# Altium PCB extpart.PcbDoc
Units mil, origin at the board's own origin, x right, y up, seen from the top; angles counter-clockwise.
Board outline 3730.03 x 3990.03 mil, 2 copper layers (Top Layer, Bottom Layer); 95 components, 138 nets, 349 pads, 189 vias.
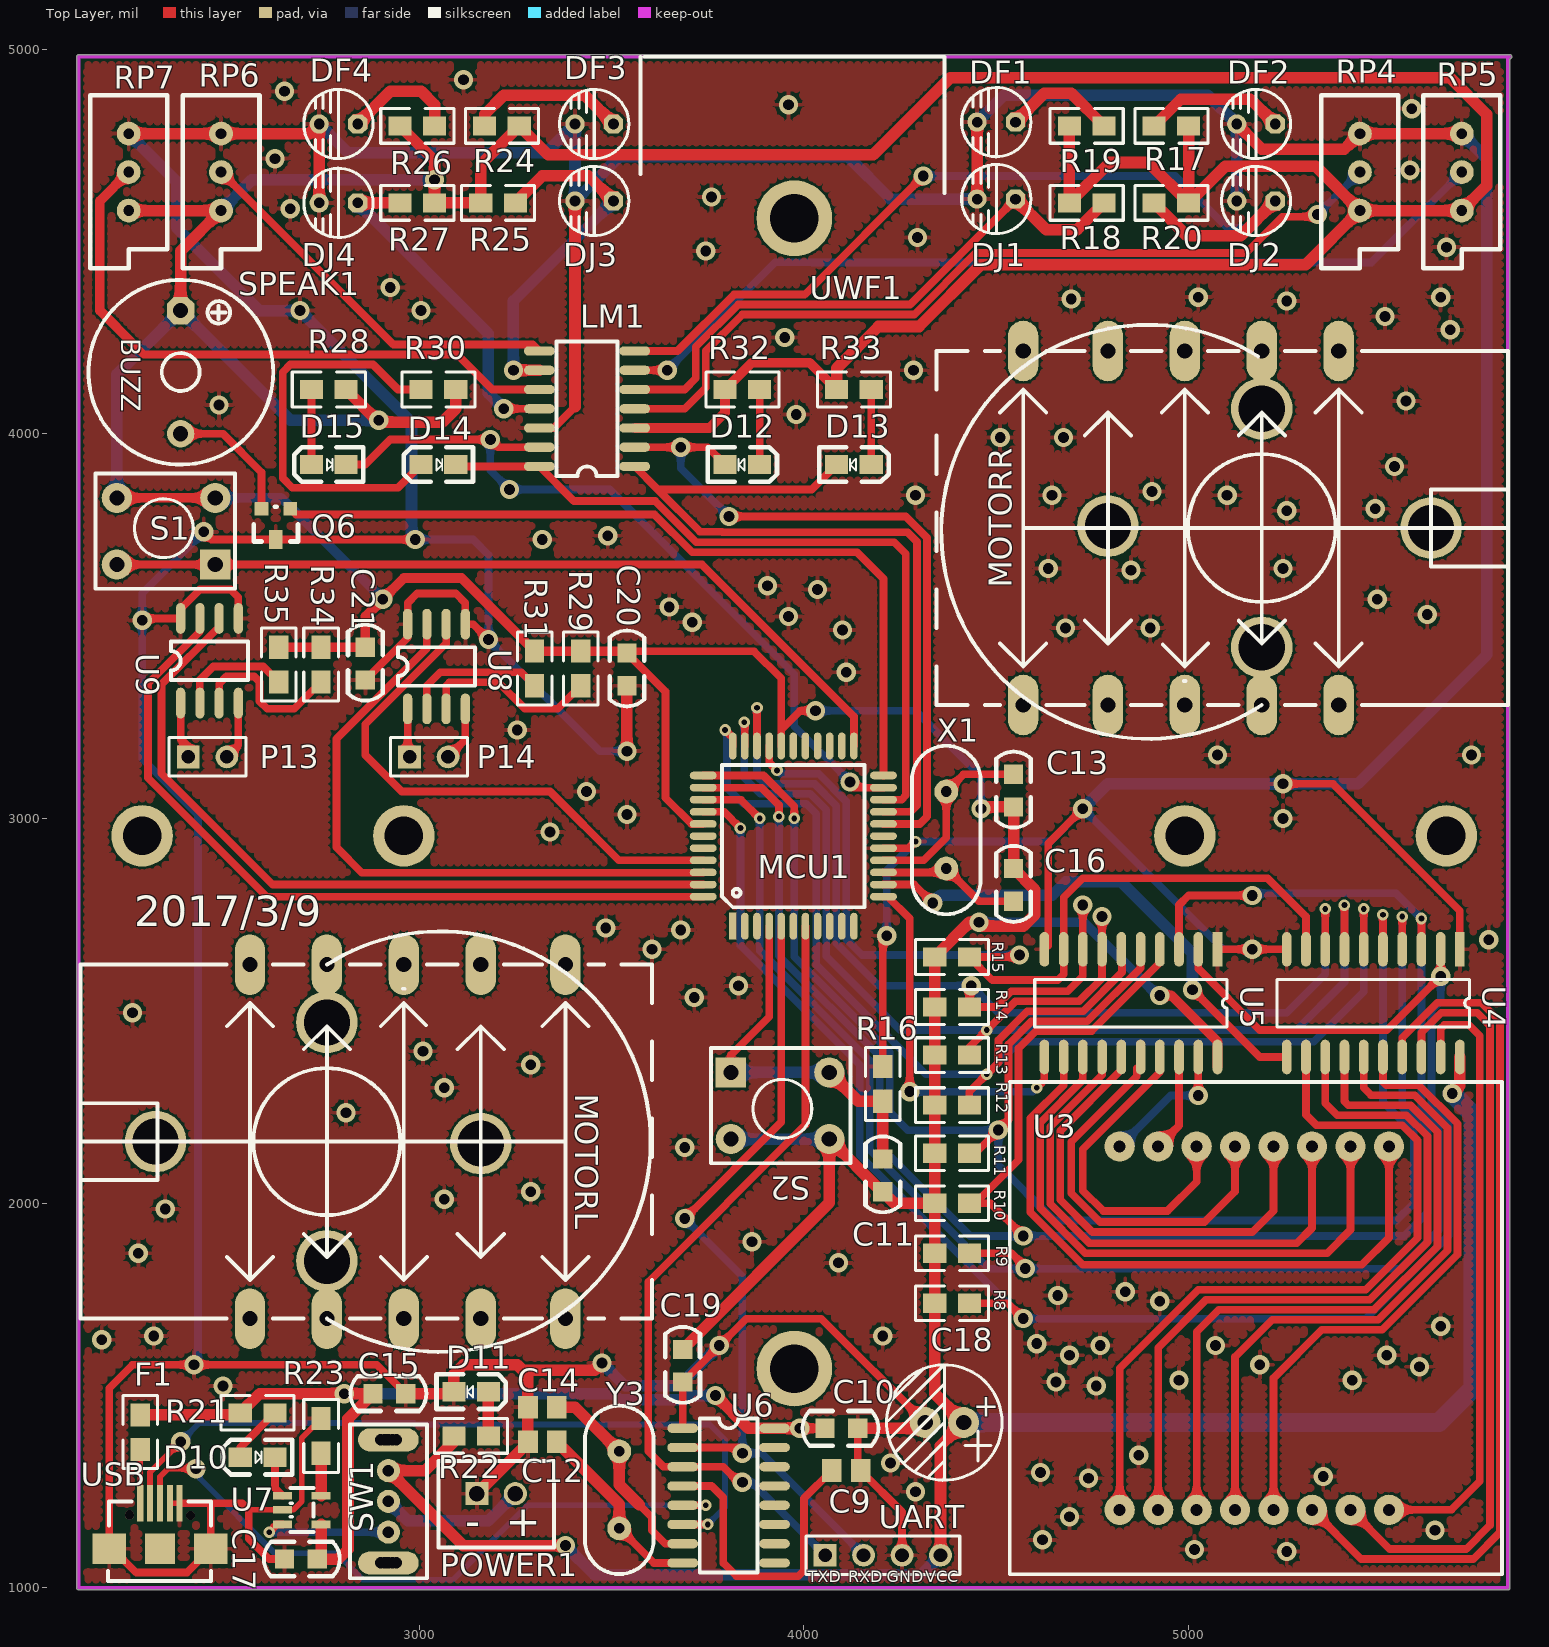
[diagram p0: Top Layer view]
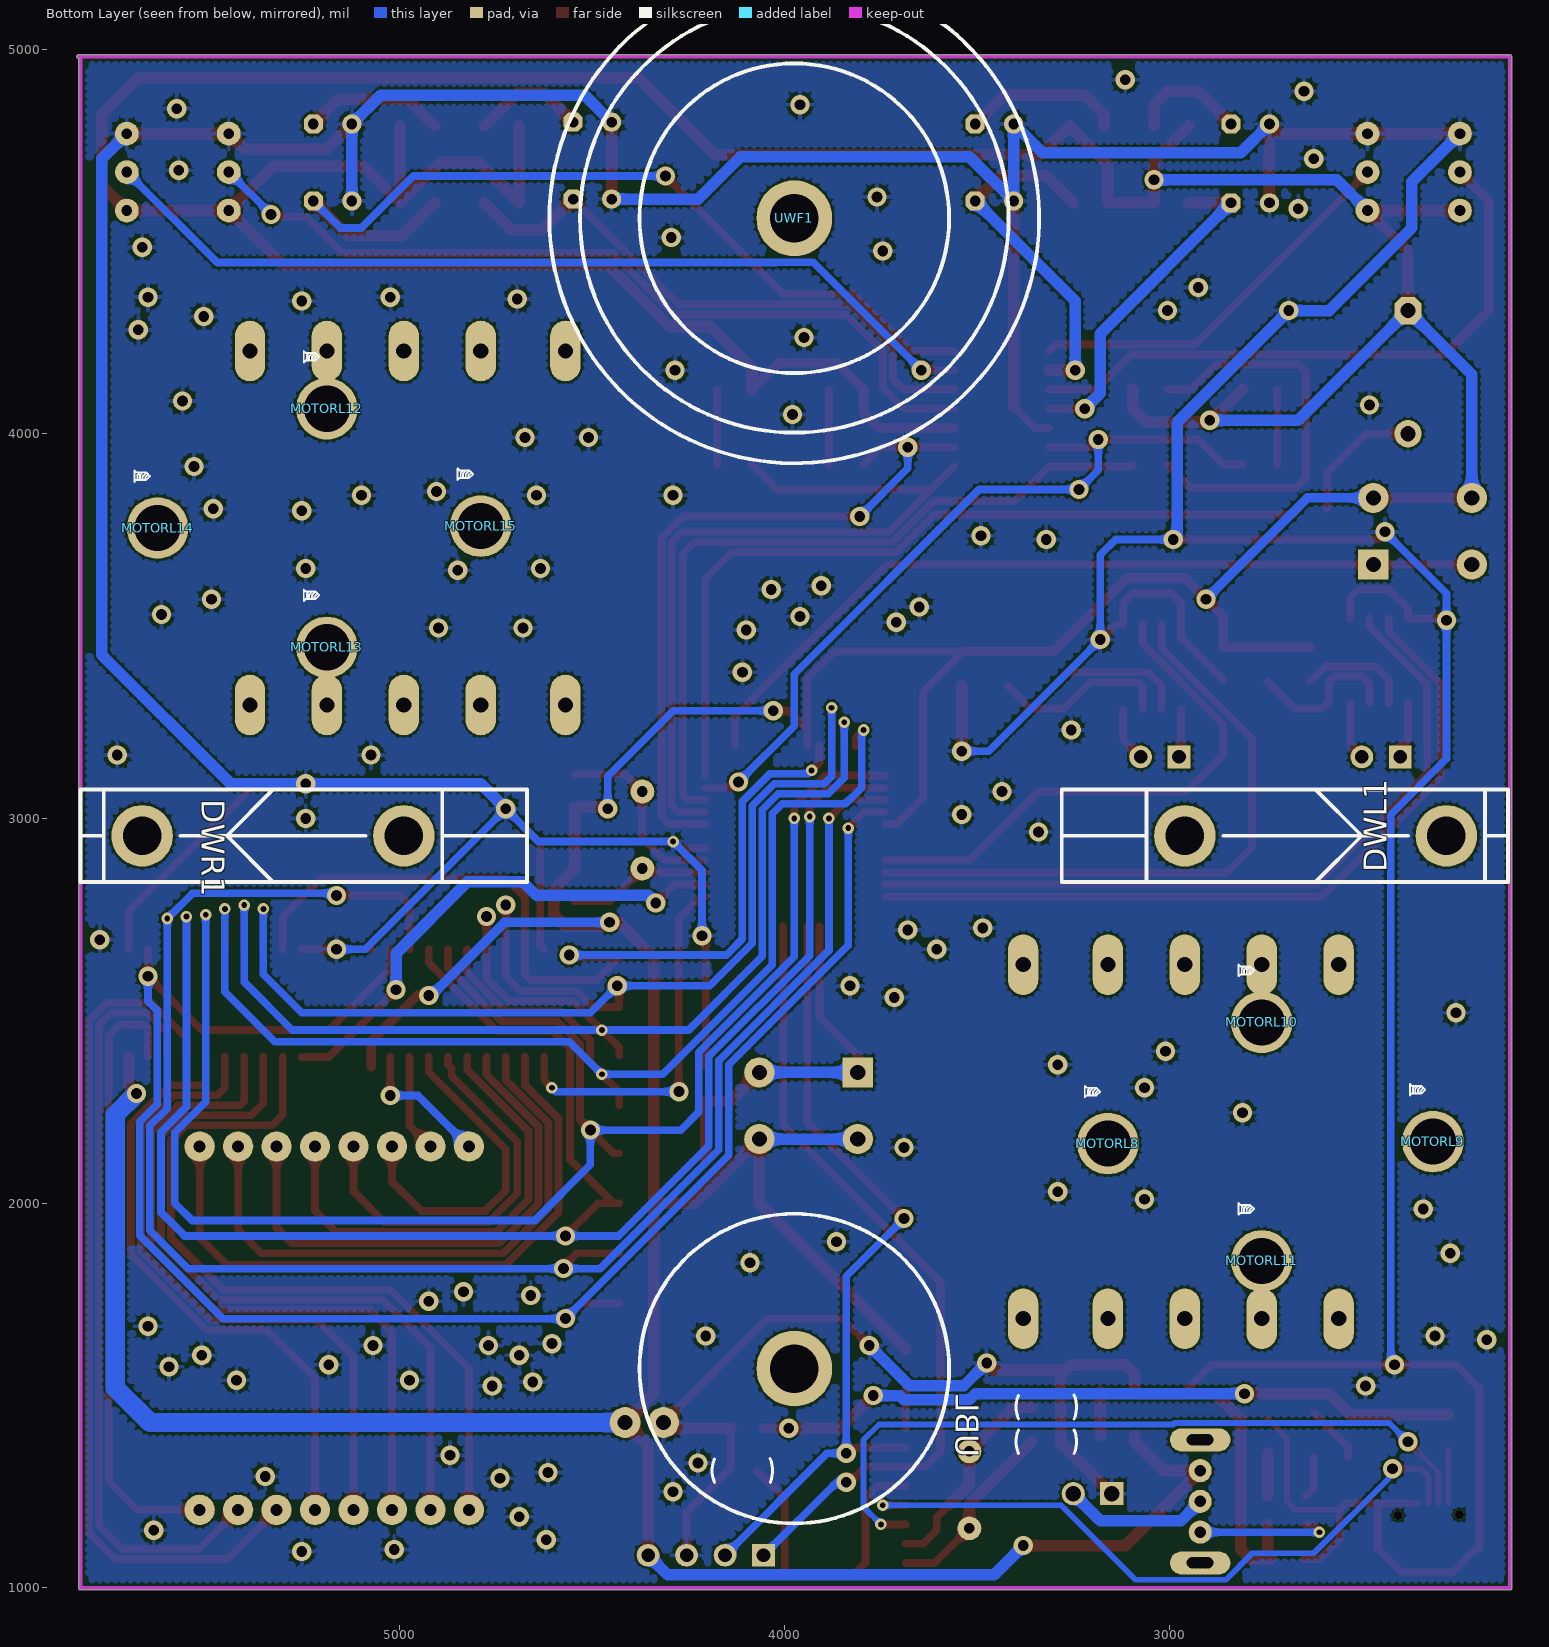
[diagram p1: Bottom Layer view, seen from below]

## Layer stack, top to bottom
Top Solder: solder mask 0.4, Solder Resist, Dk 3.5
Top Layer: signal copper 1.4
Dielectric 1: dielectric 12.6, FR-4, Dk 4.8
Bottom Layer: signal copper 1.4
Bottom Solder: solder mask 0.4, Solder Resist, Dk 3.5

## Board outline
2109.99,1000 ccw(c2115,1000) 2115,994.99 5830,994.99 ccw(c5830,1000) 5835.02,1000 5835.02,4974.98 ccw(c5835,4980) 5840.02,4980 ccw(c5835,4980) 5835,4985.02 2115,4985.02 ccw(c2115,4980) 2109.99,4980

## Design rules (kind name [scope] priority, off if disabled: settings)
Clearance [All] p1: gap=6
PolygonConnect [All] p1: connectstyle=Relief reliefconductorwidth=10 reliefentries=4 polygonreliefangle="90 Angle" airgapwidth=10
RoutingVias [All] p1: holewidth=28 width=50 viastyle="Through Hole" minholewidth=28 minwidth=50 maxholewidth=28 maxwidth=50
SolderMaskExpansion [All] p1: expansion=4
Width [All] p1: maxlimit=50 minlimit=10 preferedwidth=50
30 further rules are at their usual default settings.

## Classes and differential pairs
component class extpart: C9 C10 C11 C12 C13 C14 C15 C16 C17 C18 C19 C20 C21 D10 D11 D12 D13 D14 D15 DF1 DF2 DF3 DF4 DJ1 DJ2 DJ3 DJ4 DWL1 DWR1 F1 LM1 MCU1 P13 P14 POWER1 Q6 R8 R9 R10 R11 R12 R13 R14 R15 R16 R17 R18 R19 R20 R21 R22 R23 R24 R25 R26 R27 R28 R29 R30 R31 R32 R33 R34 R35 RP4 RP5 RP6 RP7 S1 S2 SPEAK1 SW1 U3 U4 U5 U6 U7 U8 U9 UART USB UWF1 X1 Y3

## Components (designator, comment, footprint, x,y, rotation, side; value= is the part's Value field where it differs from the comment)
C9 "Comment" C-RAD-0805 4110,1305 r0 bottom
C10 "104" 0805C 4055,1420 r0 top
C11 "474" 0805C 4210,2115 r270 top
C12 "Comment" C-RAD-0805 3320,1380 r180 bottom
C13 "104" 0805C 4550,3115 r270 top
C14 "Comment" C-RAD-0805 3320,1470 r0 bottom
C15 "104" 0805C 2880,1510 r0 top
C16 "104" 0805C 4550,2870 r270 top
C17 "1uF" 0805C 2735,1070 r180 top
C18 "Cap Pol1" RB.1/.3 4415,1430 r0 top
C19 "104" 0805C 3690,1620 r270 top
C20 "104" 0805C 3545,3430 r270 top
C21 "104" 0805C 2865,3445 r270 top
D10 "LED" 0805D 2535,1340 r0 top
D11 "LED" 0805D 3180,1510 r180 top
D12 "LED" 0805D 3885,3920 r180 top
D13 "LED" 0805D 4175,3920 r180 top
D14 "LED" 0805D 3005,3920 r0 top
D15 "LED" 0805D 2720,3920 r0 top
DF1 "LED0" LED3 4550,4810 r180 top
DF2 "LED0" LED3 5225,4805 r180 top
DF3 "LED0" LED3 3505,4805 r180 top
DF4 "LED0" LED3 2840,4805 r180 top
DJ1 "LED0" LED3 4550,4610 r180 top
DJ2 "LED0" LED3 5225,4605 r180 top
DJ3 "LED0" LED3 3505,4605 r180 top
DJ4 "LED0" LED3 2840,4600 r180 top
DWL1 "DW" DW 2960,2955 r180 bottom
DWR1 "DW" DW 4990,2955 r0 bottom
F1 "500MA" 0805R 2275,1360 r90 top
LM1 "339" SOP-14 3560,3915 r180 top
MCU1 "STC89C52" TQFP-44 3815,2720 r90 top
MOTORL "Comment" MOTOR 3080,2160 r180 top
MOTORL8 "Comment" 螺丝孔 3160,2155 r90 bottom
MOTORL9 "Comment" 螺丝孔 2315,2160 r90 bottom
MOTORL10 "Comment" 螺丝孔 2760,2470 r90 bottom
MOTORL11 "Comment" 螺丝孔 2760,1850 r90 bottom
MOTORL12 "Comment" 螺丝孔 5190,4065 r90 bottom
MOTORL13 "Comment" 螺丝孔 5190,3445 r90 bottom
MOTORL14 "Comment" 螺丝孔 5630,3755 r90 bottom
MOTORL15 "Comment" 螺丝孔 4790,3760 r90 bottom
MOTORR "Comment" MOTOR 4870,3755 r0 top
P13 "Header 2" HDR1X2 2400,3160 r0 top
P14 "Header 2" HDR1X2 2975,3160 r0 top
POWER1 "DC3.7V" XH2.54-2P 3150,1245 r0 top
Q6 "8550" SOT-23-P 2665,3805 r180 top
R8 "2K" 0805R 4430,1740 r180 top
R9 "2K" 0805R 4430,1870 r180 top
R10 "2K" 0805R 4430,2000 r180 top
R11 "2K" 0805R 4430,2130 r180 top
R12 "2K" 0805R 4430,2255 r180 top
R13 "2K" 0805R 4430,2385 r180 top
R14 "2K" 0805R 4430,2510 r180 top
R15 "2K" 0805R 4430,2640 r180 top
R16 "10K" 0805R 4205,2355 r270 top
R17 "100R" 0805R 4910,4800 r0 top
R18 "510K" 0805R 4780,4600 r180 top
R19 "100R" 0805R 4780,4800 r180 top
R20 "510K" 0805R 4910,4600 r0 top
R21 "2K" 0805R 2535,1455 r0 top
R22 "2K" 0805R 3090,1395 r0 top
R23 "2K" 0805R 2745,1440 r270 top
R24 "100R" 0805R 3170,4800 r0 top
R25 "510K" 0805R 3250,4600 r180 top
R26 "100R" 0805R 3040,4800 r180 top
R27 "510K" 0805R 2950,4600 r0 top
R28 "Comment" 0805R 2810,4115 r180 top
R29 "100R" 0805R 3420,3345 r90 top
R30 "Comment" 0805R 3095,4115 r180 top
R31 "100R" 0805R 3300,3345 r90 top
R32 "Comment" 0805R 3885,4115 r180 top
R33 "Comment" 0805R 4175,4115 r180 top
R34 "100R" 0805R 2745,3355 r90 top
R35 "100R" 0805R 2635,3355 r90 top
RP4 "100K" VR-5 5445,4780 r270 top
RP5 "100K" VR-5 5710,4780 r270 top
RP6 "100K" VR-5 2485,4780 r270 top
RP7 "100K" VR-5 2245,4780 r270 top
S1 "SW-PB" SWITCH 2470,3660 r180 top
S2 "SW-PB" SWITCH 3810,2340 r0 top
SPEAK1 "BUZZER" BUZZ 2380,4320 r270 top
SW1 "SW SPDT" SW-1-2 2920,1145 r90 top
U3 "8-8" "8-8点阵 - duplicate" 5175,1675 r180 top
U4 "74HC573" SOP-20（1.27） 5705,2660 r270 top
U5 "74HC573" SOP-20（1.27） 5075,2660 r270 top
U6 "CH340G" SOP-16 3685,1415 r0 top
U7 "TP4054" SOT-23-5 2745,1165 r90 top
U8 "L9110" SO-8 2970,3285 r90 top
U9 "L9110" SO-8 2380,3300 r90 top
UART "Header 4" HDR1X4 4055,1085 r0 top (schematic designator P?)
UBL "Comment" UW 3975,1570 r180 bottom
USB "MircoUSB" MircoUSB 2275,1210 r270 top (schematic designator P12)
UWF1 "UW" UW 3975,4560 r0 bottom
X1 "12M" XTAL2 4370,2870 r90 top
Y3 "XTAL" XTAL1 3520,1155 r90 top

## Footprints (in the part's own frame and the unit in brackets; to place one, negate y for a bottom-side part, rotate by r counter-clockwise, add the part's x,y. Pads: shape width x height; smd on the part's side, far side on the other; paste and mask are expansions set on the pad)
"8-8点阵 - duplicate" [mm]
  round 2 hole 0.8: 1(-8.78,11.99) 2(-6.24,11.99) 3(-3.7,11.99) 4(-1.16,11.99) 5(1.38,11.99) 6(3.92,11.99) 7(6.46,11.99) 8(9,11.99) 9(9,-12) 10(6.46,-12) 11(3.92,-12) 12(1.38,-12) 13(-1.16,-12) 14(-3.7,-12) 15(-6.24,-12) 16(-8.78,-12)
  silkscreen extent -16.24,-16.26 16.26,16.24
0805C [mil]
  rect 50x50 smd: 1(0,-5) 2(85,-5)
  silkscreen extent -59,-50 139,40
0805D [mil]
  rect 60x50 smd: 1(0,0) 2(90,0)
  silkscreen extent -45,-45 135,45
0805R [mil]
  rect 60x50 smd: 1(0,0) 2(90,0)
  silkscreen extent -50,-45 140,45
BUZZ [mm]
  oct 1.8x1.8 hole 1: 1(0,0)
  round 1.8 hole 1: 2(8.128,0)
  silkscreen extent -2.03,-6.09 10.17,6.11
C-RAD-0805 [mm]
  rect 1.3x1.5 smd far side: 1(-0.95,0) 2(0.95,0)
  silkscreen extent -2,-0.79 2,0.79, body extent -1.27,-0.64 1.27,0.64, height 0.9
DW [mil]
  round 160 hole 100: 0(0,0) 0(680,0)
  silkscreen extent -320,-120 840,120
HDR1X2 [mm] "Connector; Header; 2 Position"
  rect 1.5x1.5 hole 0.9: 1(0,0)
  round 1.5 hole 0.9: 2(2.54,0)
  silkscreen extent -1.27,-1.27 3.81,1.27
HDR1X4 [mm] "Connector; Header; 4 Position"
  rect 1.5x1.5 hole 0.9: 1(0,0)
  round 1.5 hole 0.9: 2(2.54,0) 3(5.08,0) 4(7.62,0)
  silkscreen extent -1.27,-1.27 8.89,1.27
LED3 [mm]
  oct 1.27x1.27 hole 0.7: A(0,0)
  round 1.27 hole 0.7: K(2.54,0)
  silkscreen extent -1.02,-2.29 3.55,2.29
MircoUSB [mm]
  rect 2.4x0.4 smd: 1(-0.25,0) 2(-0.25,0.65) 3(-0.25,1.3) 4(-0.25,1.95) 5(-0.25,2.6)
  rect 2x2.2 smd: 6(2.75,4.65) 7(2.75,-2.05)
  rect 2x2 smd: 8(2.75,1.3)
  silkscreen extent -0.37,-2.12 4.88,4.67
MOTOR [mm]
  oval 2x4 hole 1: 0(-7.62,11.684) 0(-7.62,-11.684) 0(-2.032,11.684) 0(-2.032,-11.684) 0(3.048,11.684) 0(3.048,-11.684) 0(8.128,11.684) 0(8.128,-11.684) 0(13.208,-11.684) 0(13.208,11.684)
  silkscreen extent -13.33,-11.68 24.38,11.68
RB.1/.3 [mil]
  round 80 hole 40: 1(0,0) 2(-100,0)
  silkscreen extent -200,-150 100,150
SO-8 [mil]
  oval 80x24 smd: 1(0,0) 2(0,-50) 3(0,-100) 4(0,-150) 5(220,-150) 6(220,-100) 7(220,-50) 8(220,0)
  silkscreen extent 60,-175 160,25
SOP-14 [mil]
  oval 80x24 smd: 1(0,0) 2(0,-50) 3(0,-100) 4(0,-150) 5(0,-200) 6(0,-250) 7(0,-300) 8(247.56,-300) 9(247.56,-250) 10(247.56,-200) 11(247.56,-150) 12(247.56,-100) 13(247.56,-50) 14(247.56,0)
  silkscreen extent 44,-325 203,25
SOP-16 [mil]
  oval 80x24 smd: 1(0,0) 2(0,-50) 3(0,-100) 4(0,-150) 5(0,-200) 6(0,-250) 7(0,-300) 8(0,-350) 9(238.5,-350) 10(238.5,-300) 11(238.5,-250) 12(238.5,-200) 13(238.5,-150) 14(238.5,-100) 15(238.5,-50) 16(238.5,0)
  silkscreen extent 44,-375 194,25
SOP-20（1.27） [mil]
  rect 90x25 smd: 1(0,0)
  oval 90x25 smd: 2(0,-50) 3(0,-100) 4(0,-150) 5(0,-200) 6(0,-250) 7(0,-300) 8(0,-350) 9(0,-400) 10(0,-450) 11(280,-450) 12(280,-400) 13(280,-350) 14(280,-300) 15(280,-250) 16(280,-200) 17(280,-150) 18(280,-100) 19(280,-50) 20(280,0)
  silkscreen extent 78,-475 202,25
SOT-23-5 [mil]
  rect 20x50 smd: 1(75,100) 2(38,100) 3(0,100) 4(0,0) 5(75,0)
  silkscreen extent -20,20 95,80
SOT-23-P [mil]
  rect 36x36 smd: 1(0,0) 2(75,0)
  rect 36x50 smd: 3(38,80)
  silkscreen extent -20,-5 95,85
SW-1-2 [mil]
  oval 60x157.48 hole 30: 0(-80,0) 0(240,0)
  round 60 hole 30: 1(80,0) 2(0,0) 3(160,0)
  silkscreen extent -120,-100 280,100
SWITCH [mm]
  rect 2x2 hole 1: 1(0,0)
  round 2 hole 1: 1(6.5,0) 2(0,-4.4) 2(6.5,-4.4)
  silkscreen extent -1.3,-6 7.9,1.6
TQFP-44 [mm]
  rect 1.778x0.5 smd: 1(0,0)
  oval 1.778x0.5 smd: 2(0,-0.8) 3(0,-1.6) 4(0,-2.4) 5(0,-3.2) 6(0,-4) 7(0,-4.8) 8(0,-5.6) 9(0,-6.4) 10(0,-7.2) 11(0,-8) 23(11.9,-8) 24(11.9,-7.2) 25(11.9,-6.4) 26(11.9,-5.6) 27(11.9,-4.8) 28(11.9,-4) 29(11.9,-3.2) 30(11.9,-2.4) 31(11.9,-1.6) 32(11.9,-0.8) 33(11.9,0)
  oval 0.5x1.778 smd: 12(1.95,-9.95) 13(2.75,-9.95) 14(3.55,-9.95) 15(4.35,-9.95) 16(5.15,-9.95) 17(5.95,-9.95) 18(6.75,-9.95) 19(7.55,-9.95) 20(8.35,-9.95) 21(9.15,-9.95) 22(9.95,-9.95) 34(9.95,1.95) 35(9.15,1.95) 36(8.35,1.95) 37(7.55,1.95) 38(6.75,1.95) 39(5.95,1.95) 40(5.15,1.95) 41(4.35,1.95) 42(3.55,1.95) 43(2.75,1.95) 44(1.95,1.95)
  silkscreen extent 1.25,-8.7 10.65,0.7
UW [mm]
  round 5 hole 3.2: 0(0,0)
  silkscreen extent -10.22,-10.22 10.22,10.22
VR-5 [mil]
  round 62 hole 28: 1(0,0) 2(100,0) 3(200,0)
  silkscreen extent -100,-100 350,100
XH2.54-2P [mil]
  rect 60x60 hole 40: 1(0,0)
  round 60 hole 40: 2(100,0)
  silkscreen extent -100,-140 200,85
XTAL1 [mil]
  round 62 hole 28: 1(0,0) 2(200,0)
  silkscreen extent -119,-89 319,89
XTAL2 [mil]
  round 62 hole 28: 1(0,0) 2(200,0)
  silkscreen extent -119,-89 319,89
螺丝孔 [mil]
  round 160 hole 120 unplated: 0(0,0)
  silkscreen extent 120,20 150,60

## Part data
C10 C11 C13 C15 C16 C17 C19 C20 C21: library part CAP, "Capacitor"
C18: "Polarized Capacitor (Radial)"
DF1 DF2 DF3 DF4 DJ1 DJ2 DJ3 DJ4: "发光二极管"
DWL1 DWR1: "driving wheel"
F1: library part FUSE1, "Fuse"
LM1: library part Component_1
MCU1: library part STC89C52RC-PQFP, "MCU"
P13 P14: "Header, 2-Pin"
POWER1: library part CON2, "Connector"
Q6: library part PNP1, "PNP Transistor"
R8 R9 R10 R11 R12 R13 R14 R15 R16 R17 R18 R19 R20 R21 R22 R23 R24 R25 R26 R27 R29 R31 R34 R35: library part RES2
RP4 RP5 RP6 RP7: library part POT2, "Potentiometer"
SPEAK1: "Buzzer"
U3: library part 8-8点阵
U6: "USB-SERIAL"
UART: "Header, 4-Pin"
USB: library part "Header 5", "5PIN"
UWF1: "universal wheel"
X1: library part CRYSTAL, "Crystal"
Y3: "晶振"

## Via types
v1: diameter 50, hole 28, Top Layer to Bottom Layer, 158 vias
v2: diameter 30, hole 15, Top Layer to Bottom Layer, 21 vias
v3: diameter 30, hole 30, Top Layer to Bottom Layer, 8 vias
v4: diameter 23.62, hole 23.62, Top Layer to Bottom Layer, 2 vias

## Nets (pads, with @x,y where several pads share a name; then routed paths per layer and width w, separated by ;. In a path a pad name is that pad's centre, name@x,y a point inside that pad or via, vN(x,y) a via of type N, cw(c..) or ccw(c..) an arc to the next point about the centre after c; other vN are vias at no path point)
042: MCU1.39
+5: C10.1 C15.1 C17.1 F1.2 R21.1 U6.16 U7.4 | length 2533.5
  Top Layer w25: v1(3989.25,1415) C10.1
  Top Layer w30: F1.2 R21.1@2530,1450 ; R21.1 2585,1505 v1(2805,1505) C15.1 2815,1440 2815,1100 2790,1075 C17.1 2745,1085 U7.4 ; v1(3770,1500) 3855,1415 U6.16 v1(3989.25,1415)
  Bottom Layer w30: v1(2805,1505) 3504.09,1505 3520.09,1489 3689.91,1489 3700.91,1500 v1(3770,1500)
CHOOSE1: MCU1.13 U4.11 | length 1335.2
  Top Layer w20: MCU1.13 4286.73,2828.27 v1(4335,2780) ; v1(5010,2555) 5185,2380 U4.11
  Bottom Layer w30: v1(4335,2780) 4355,2800 4645,2800 4680,2835 4825,2835 5010,2650 v1(5010,2555)
CHOOSE2: MCU1.12 U5.11 | length 964.2
  Top Layer w20: MCU1.12 4218.23,2796.77 4275,2740 v1(4275,2290) ; v2(4605,2300) 4625,2320 U5.11
  Bottom Layer w20: v1(4275,2290) 4595,2290 v2(4605,2300)
CHRG: SW1.2 U7.3 | length 353.3
  Top Layer w20: v2(2610,1145) 2630,1165 U7.3
  Bottom Layer w20: v2(2610,1145) SW1.2
D+: U6.5 USB.3 | length 1765.2
  Top Layer w15: USB.3 2326.18,1288.82 2347.36,1310 v1(2420,1310)
  Top Layer w20: U6.5 v2(3745,1215)
  Bottom Layer w15: v1(2420,1310) 2430,1300 2430,1284.69 2624.7,1090 2784.74,1090 2853.24,1021.5 3088.02,1021.5 3281.52,1215 v2(3745,1215)
D-: U6.6 USB.2 | length 1949.8
  Top Layer w15: USB.2 2300.59,1300.59 v1(2380,1380)
  Top Layer w20: U6.6 v2(3750,1165)
  Bottom Layer w15: v1(2380,1380) 2428.5,1428.5 2986.76,1428.5 2990.26,1425 3755,1425 3795,1385 3795,1210 v2(3750,1165)
ENBELL: 
ENDPY: 
ENLCD: 
ENLED: 
GND: C9.2 C10.2 C12.2 C14.1 C15.2 C17.2 C18.2 C19.2 C20.2 C21.2 D11.2 DF1.K DF2.K DF3.K DF4.K DJ1.K DJ2.K DJ3.K DJ4.K LM1.12 MCU1.16 POWER1.1 Q6.3 R16.1 R23.1 RP4.1 RP5.1 RP6.1 RP7.1 U4.1 U4.10 U5.1 U5.10 U6.1 U7.2 U8.5 U8.8 U9.5 U9.8 UART.3 USB.4 USB.5 USB.6 USB.7 | length 22385.1
  Top Layer w15: USB.4 USB.5 ; 2557,1203 U7.2 2673,1203 2695,1225 2695,1390 R23.1
  Top Layer w20: v1(2280,3515) 2285,3520 U9.8 2380,3545 2430,3595 2510,3595 2530,3575 U9.5 ; USB.5 2455.16,1219.84 ; v1(2440,3745) 2460,3725 Q6.3 v1(2990,3725) ; C17.2 2610,1075 2557,1128 2557,1203 2540.16,1219.84 2455.16,1219.84 ; C21.2 2970,3470 U8.8 2970,3560 2995,3585 3095,3585 3120,3560 U8.5 3140,3505 v1(3180,3465) ; C15.2 2890,1580 v1(2415,1580) 2255,1580 2194.29,1519.29 USB.7 2203.27,1101.73 2265,1040 2396.34,1040 USB.6 2458.07,1216.93 2455.16,1219.84 ; LM1.12 3350,4015 3405,4070 ; U6.1 C19.2 v1(3780,1630) 3850,1700 4045,1700 C18.2 ; C9.2@4140,1312.4 C10.2 ; C9.2 4255,1197.4 UART.3 ; R16.1 4205,2685 v1(4215,2695) ; MCU1.16 4272.76,2922.76 v2(4290,2940) ; U5.10 4635,2670 4635,2935 v1(4725,3025) ; U5.1 v1(5165,2660) U4.10 ; v1(5245,3090) 5375,3090 5705,2760 U4.1
  Top Layer w30: RP7.1 RP6.1 2715,4780 DF4.K DJ4.K ; C15.2 3085,1505 D11.2 3090,1555 3115,1580 3255,1580 3268.8,1566.2 ; POWER1.1 3282.6,1377.6 C12.2 C14.1 3282.6,1552.4 3268.8,1566.2 ; 3405,4070 DJ3.K ; v1(3475,1585) 3456.2,1566.2 3268.8,1566.2 ; v1(3540,3175) C20.2 ; C10.2 4300,1415 C18.2 ; DJ1.K DF1.K ; DF2.K 5190,4740 5405,4740 RP4.1 RP5.1
  Bottom Layer w20: v1(2415,1580) 2425,1590 2425,3010 2280,3155 v1(2280,3515) 2280,3585 v1(2440,3745) ; v1(2990,3725) 3140,3725 3180,3685 v1(3180,3465) 3470,3175 v1(3540,3175) ; v1(4215,2695) 4215,2865 v2(4290,2940) 4640,2940 v1(4725,3025) 5090,2660 v1(5165,2660)
  Bottom Layer w30: RP7.1 2370,4655 2370,4535 2585,4320 v1(2690,4320) 2980,4030 2980,3735 v1(2990,3725) ; DF4.K 2815,4730 3330,4730 DF3.K DJ3.K 3520,4720 4115,4720 4225,4610 DJ1.K ; v1(3475,1585) 3535,1525 3675,1525 v1(3780,1630) ; DF1.K 4520,4880 5050,4880 DF2.K DJ2.K ; v1(4725,3025) 4790,3090 v1(5245,3090) 5440,3090 5775,3425 5775,4715 RP5.1
  other v1: 5255,1095 5015,1100 4620,1125 5640,1150 4690,1185 4290,1250 4740,1285 5350,1290 4615,1300 4225,1325 4870,1345 2490,1525 4760,1525 4655,1535 4975,1540 5425,1540 5600,1575 5185,1580 4690,1605 5515,1605 4770,1630 5070,1630 4605,1635 2175,1645 2310,1655 4205,1655 5655,1680 4925,1745 4660,1760 4835,1770 4090,1845 2270,1870 3865,1900 2340,1985 3065,2010 3290,2030 3690,2145 2810,2235 3065,2300 3290,2360 3010,2395 2255,2495 3715,2535 3830,2565 3605,2660 5780,2685 3680,2710 3485,2715 3340,2965 5245,3000 3540,3010 3435,3070 5075,3165 5735,3165 3255,3230 4110,3380 4100,3490 4680,3495 4900,3495 3710,3510 3960,3525 5620,3530 3650,3550 5490,3570 4035,3595 3905,3605 4850,3645 4635,3650 5245,3650 3320,3725 3490,3735 5255,3800 5485,3805 4290,3840 4645,3840 5100,3840 4905,3850 5535,3915 4510,3990 4675,3990 3980,4050 2480,4075 5565,4085 4285,4165 3950,4250 5680,4270 5510,4305 3005,4320 5255,4345 4695,4350 5025,4355 5655,4355 2925,4380 3745,4475 5670,4485 4295,4510 2665,4585 3760,4615 5575,4685 2625,4715 5580,4845 3960,4855 2650,4890 3115,4920
IN1+: DJ1.A LM1.5 R18.1 | length 1535.1
  Top Layer w20: LM1.5 3690,4115 3719,4144 3719,4225.77 3828.97,4335.74 4275.74,4335.74 DJ1.A
  Top Layer w30: DJ1.A 4630,4530 4710,4530 R18.1
IN1-: LM1.4 RP4.2 | length 2195.4
  Top Layer w20: LM1.4 3690,4065 3745,4120 3745,4215 3839.74,4309.74 4286.51,4309.74 4446.77,4470 5150,4470 5244,4564 5329,4564 v1(5335,4570)
  Bottom Layer w20: v1(5335,4570) RP4.2
IN2+: DJ2.A LM1.7 R20.1 | length 2325.9
  Top Layer w20: LM1.7 3671.46,4215 3818.2,4361.74 4001.74,4361.74 v1(4310,4670)
  Top Layer w30: R20.1 4995,4515 5135,4515 DJ2.A
  Bottom Layer w20: v1(4310,4670) 4965,4670 5100,4535 5155,4535 DJ2.A
IN2-: LM1.6 RP5.2 | length 2364.9
  Top Layer w20: LM1.6 v1(3645,4165)
  Bottom Layer w20: v1(3645,4165) 3925.57,4445.57 4022.4,4445.57 4021.82,4445 5475,4445 RP5.2
IN3+: DJ3.A LM1.9 R25.1 | length 926.1
  Top Layer w30: v1(3245,4165) LM1.9 ; R25.1 3320,4670 3440,4670 DJ3.A
  Bottom Layer w30: v1(3245,4165) 3245,4345 DJ3.A
IN3-: LM1.8 RP6.2 | length 1020.1
  Top Layer w20: RP6.2 2933,4232 3295.44,4232 LM1.8
IN4+: DJ4.A LM1.11 R27.1 | length 894.8
  Top Layer w20: v1(3220,4065) LM1.11
  Top Layer w30: DJ4.A R27.1
  Bottom Layer w30: DJ4.A 3180,4260 3180,4105 v1(3220,4065)
IN4-: LM1.10 RP7.2 | length 1618.4
  Top Layer w20: 2260,4230 2284,4206 3099,4206 3190,4115 LM1.10
  Top Layer w25: RP7.2 2170,4605 2170,4320 2260,4230
ML1: MCU1.41 U8.6 | length 1418.6
  Top Layer w20: U8.6 3070,3455 2860,3245 2860,3165 2955,3070 3340,3070 3518.74,2891.26 MCU1.41
ML2: MCU1.42 U8.7 | length 1658.7
  Top Layer w20: U8.7 3020,3441.77 2785,3206.77 2785,2925 2851,2859 3738.23,2859 MCU1.42
MR1: MCU1.43 U9.6 | length 1992.5
  Top Layer w20: U9.6 2480,3498.23 2330,3348.23 2330,3117.77 2619.5,2828.27 MCU1.43
MR2: MCU1.44 U9.7 | length 2041.2
  Top Layer w20: U9.7 2430,3485 2295,3350 2295,3106 2604.23,2796.77 MCU1.44
NetC1_1: 
NetC4_2: 
NetC5_2: 
NetC9_1: C9.1 U6.4 | length 808.2
  Top Layer w20: U6.4 3760,1265 3790,1235 3790,1065 3825,1030 3985,1030 4000,1045 4000,1232.4 C9.1
NetC10_1: 
NetC12_2: C14.2 U6.7 Y3.2 | length 544.9
  Top Layer w20: 3572,1216.31 3605,1183.31 3605,1150 3640,1115 U6.7
  Top Layer w30: C14.2 3405,1470 Y3.2 3520,1268.31 3572,1216.31
NetC14_2: C12.1 U6.8 Y3.1 | length 494.6
  Top Layer w20: Y3.1 3610,1065 U6.8
  Top Layer w30: C12.1 3520,1217.4 Y3.1
NetD1_A: 
NetD2_A: 
NetD3_A: 
NetD4_A: 
NetD5_A: 
NetD6_A: 
NetD7_A: 
NetD8_A: 
NetD9_A: 
NetD10_1: D10.1 R21.2 | length 152.3
  Top Layer w20: D10.1 2535,1365 R21.2
NetD10_2: D10.2 U7.1 | length 108.3
  Top Layer w20: D10.2 2625,1260 U7.1
NetD11_1: D11.1 R22.2 | length 115
  Top Layer w30: R22.2 D11.1
NetD12_1: D12.1 R32.1 | length 195
  Top Layer w20: D12.1 R32.1
NetD13_1: D13.1 R33.1 | length 195
  Top Layer w20: D13.1 R33.1
NetD14_1: D14.1 R30.2 | length 1065.4
  Top Layer w20: D14.1 2945,3860 2670,3860 2645,3885 2645,4160 2665,4180 2880,4180 2945,4115 R30.2
NetD15_1: D15.1 R28.2 | length 195
  Top Layer w20: D15.1 R28.2
NetDF1_A: DF1.A R19.1 | length 296.3
  Top Layer w30: DF1.A 4625,4885 4695,4885 R19.1
NetDF2_A: DF2.A R17.1 | length 370.9
  Top Layer w30: R17.1 4980,4870 5160,4870 DF2.A
NetDF3_A: DF3.A R24.1 | length 416.8
  Top Layer w30: R24.1 3170,4830 3220,4880 3430,4880 DF3.A
NetDF4_A: DF4.A R26.1 | length 304.7
  Top Layer w30: DF4.A 2925,4890 3005,4890 3040,4855 R26.1
NetDS1_1: 
NetDS2_1: 
NetDS3_1: 
NetDS4_1: 
NetF1_1: F1.1 USB.1 | length 140.2
  Top Layer w15: USB.1 F1.1
NetLS1_1: 
NetP1_3: 
NetPOWER1_2: POWER1.2 SW1.1 | length 379.7
  Bottom Layer w30: SW1.1 2970,1175 3180,1175 POWER1.2
NetQ1_2: 
NetQ2_2: 
NetQ3_2: 
NetQ4_2: 
NetQ5_2: 
NetQ6_2: Q6.2 SPEAK1.2 | length 346.4
  Top Layer w20: SPEAK1.2 2490,4000 2590,3900 Q6.2
NetR23_2: R23.2 U7.5 | length 110
  Top Layer w30: U7.5 R23.2
NetR29_1: R29.1 U8.3 | length 467.2
  Top Layer w20: U8.3 3070,3345 3079,3354 3206,3354 3275,3285 3360,3285 R29.1
NetR31_1: R31.1 U8.2 | length 369
  Top Layer w20: U8.2 3020,3345 3055,3380 3265,3380 R31.1
NetR34_1: R34.1 U9.3 | length 415.9
  Top Layer w20: U9.3 2480,3350 2499,3369 2571,3369 2585,3355 2585,3305 2605,3285 2675,3285 R34.1
NetR35_1: R35.1 U9.2 | length 296.1
  Top Layer w20: U9.2 2430,3360 2465,3395 2595,3395 R35.1
OAL: P13.1 U9.1 | length 148.3
  Top Layer w20: U9.1 2380,3205 2400,3185 P13.1
OAR: P14.1 U8.1 | length 127.1
  Top Layer w20: U8.1 2970,3165 P14.1
OBL: P13.2 U9.4 | length 152.4
  Top Layer w20: P13.2 2530,3190 U9.4
OBR: P14.2 U8.4 | length 143.6
  Top Layer w20: P14.2 3120,3205 U8.4
OUT1: D12.2 LM1.2 MCU1.18 | length 1869.4
  Top Layer w20: LM1.2 v1(3680,3965) 3750,3965 D12.2 ; v1(3805,3785) 4265,3785 4320,3730 4320,3005 4300.75,2985.75 MCU1.18
  Bottom Layer w20: v1(3680,3965) 3680,3910 v1(3805,3785)
OUT2: D13.2 LM1.1 MCU1.19 | length 2086.5
  Top Layer w20: LM1.1 3620,3855 ; D13.2 4020,3855 3620,3855 ; MCU1.19 4277.24,3017.24 4294,3034 4294,3719.23 4269.23,3744 3788.02,3744 3787.02,3745 3730,3745 3620,3855
OUT3: D14.2 LM1.14 MCU1.20 | length 1957
  Top Layer w20: D14.2 3100,3915 LM1.14 3402.44,3825 3613.23,3825 3720.23,3718 4235,3718 4265,3688 4265,3060 4253.74,3048.74 MCU1.20
OUT4: D15.2 LM1.13 MCU1.21 | length 2060.1
  Top Layer w20: D15.2 2860,3920 2925,3985 v1(3185,3985) 3205,3965 LM1.13 ; v1(4120,3095) 4134.76,3080.24 MCU1.21
  Bottom Layer w20: v1(3185,3985) 3185,3905 v1(3235,3855) 3495,3855 3975,3375 3975,3240 v1(4120,3095)
P00: MCU1.37 R8.1 U4.2 U5.2 | length 4622.6
  Top Layer w20: MCU1.37 3792.76,3017.24 v2(3835,2975) ; R8.1 4530,1740 v1(4570,1700) ; U5.2 5025,2610 5185,2450 5515,2450 v1(5655,2590) U4.2
  Bottom Layer w20: v2(3835,2975) 3835,2670 4145,2360 4145,2125 v1(4570,1700) 5460,1700 5676,1916 5676,2211.77 5631,2256.77 5631,2501 5655,2525 v1(5655,2590)
P01: MCU1.36 R9.1 U4.3 U5.3 | length 4648.2
  Top Layer w20: MCU1.36 3836.26,3048.74 v2(3885,3000) ; R9.1 4540,1870 v1@4575,1835 ; U5.3 4975,2775 5000,2800 v1(5165,2800) ; U4.3 v2(5605,2740)
  Bottom Layer w20: v2(3885,3000) 3885,2656.77 4171,2370.77 4171,2139 4480,1830 v1(4575,1830) 5550,1830 5650,1930 5650,2201 5605,2246 v2(5605,2740) 5539,2806 5171,2806 v1(5165,2800)
P02: MCU1.35 R10.1 U4.4 U5.4 | length 4756.1
  Top Layer w20: MCU1.35 3889.76,3080.24 3935,3035 v2(3935,3005) ; R10.1 R10.1@4445,2000 ; v1(4570,1915) 4485,2000 R10.1@4445,2000 ; U5.4 4925,2624.69 4747.31,2447 4602.31,2447 4557.88,2402.58 4557.88,2112.88 R10.1@4445,2000 ; U4.4 v2(5555,2745)
  Bottom Layer w20: v2(3935,3005) 3935,2643.54 4197,2381.54 4197,2149.77 4431.77,1915 v1(4570,1915) 5560,1915 5621,1976 5621,2184 5555,2250 v2(5555,2745)
P03: MCU1.34 R11.1 U4.5 U5.5 | length 4388.7
  Top Layer w20: MCU1.34 3895.04,3111.73 3975,3031.77 v2(3975,3000) ; R11.1 4445,2130 v1(4505,2190) 4531.88,2216.88 4531.88,2413.35 4591.54,2473 4736.54,2473 4875,2611.46 U5.5 ; U4.5 v2@5505,2740
  Bottom Layer w20: v2(3975,3000) 3975,2640.31 4223,2392.31 4223,2237 4270,2190 v1(4505,2190) 4505,2100 4650,1955 5540,1955 5585,2000 5585,2183.23 5505,2263.23 v2(5505,2750)
P04: MCU1.33 R12.1 U4.6 U5.6 | length 3449
  Top Layer w20: v2(3795,3230) 3815,3210 MCU1.33 ; R12.1 4430,2290 v2(4475,2335) 4505.88,2365.88 4505.88,2424.12 4580.77,2499 4725.77,2499 4826.77,2600 4826.77,2658.23 U5.6 ; U4.6 v2@5455,2755
  Bottom Layer w20: v2(3795,3230) 3800,3225 3800,3080 3842,3038 4005.84,3038 4032,3011.84 4032,2620.08 4317.08,2335 v2(4475,2335) 4560,2420 5325,2420 5455,2550 v2(5455,2765)
P05: MCU1.32 R13.1 U4.7 U5.7 | length 3227.1
  Top Layer w20: v2(3845,3250) 3846.5,3248.5 MCU1.32 ; R13.1 4430,2405 v2(4475,2450) 4550,2525 4715,2525 4775,2585 U5.7 v1(4775,2745) ; U4.7 v2(5405,2775)
  Bottom Layer w20: v2(3845,3250) 3845,3106 3887,3064 4016.61,3064 4058,3022.61 4058,2642 4250,2450 v2(4475,2450) 5280,2450 5405,2575 v2(5405,2775)
P06: MCU1.31 R14.1 U4.8 U5.8 | length 3105.3
  Top Layer w20: MCU1.31 v2(3877.99,3287.99) ; v1(4435,2565) 4430,2560 R14.1 4498.23,2510 4539.23,2551 4686,2551 4725,2590 U5.8 v1(4725,2775) ; U4.8 v2(5355,2765)
  Bottom Layer w20: v2(3877.99,3287.99) 3877.99,3109.78 3897.77,3090 4027.38,3090 4084,3033.38 4084,2676 4195,2565 v1(4435,2565) 4505,2495 5255,2495 5355,2595 v2(5355,2765)
P07: MCU1.30 R15.1 U4.9 U5.9 | length 2495.4
  Top Layer w20: MCU1.30 3909.49,3145.51 v2(3930,3125) ; v1(4560,2645) 4555,2640 R15.1 4490,2580 4660,2580 4675,2595 U5.9 4675,2795 4725,2845 5205,2845 5305,2745 U4.9
  Bottom Layer w20: v2(3930,3125) 3939,3116 4038.15,3116 4110,3044.15 4110,2686.77 4151.77,2645 v1(4560,2645)
P10: MCU1.40
P11: 
P12: 
P13: 
P14: 
P15: MCU1.1
P16: MCU1.2
P17: MCU1.3
P20: 
P21: 
P22: 
P23: 
P24: 
P25: MCU1.23 S1.1 | length 2156
  Top Layer w20: S1.1@2214.09,3660 2470,3660 3735,3660 4129.96,3265.04 MCU1.23
P26: MCU1.24
P27: MCU1.25
P30: 
P31: 
P32: MCU1.8
P33: MCU1.9
P34: 
P35: 
P36: 
P37: 
P40: MCU1.17
P41: MCU1.28
P43: MCU1.6
Q1: U3.1 U4.19 | length 1617.3
  Top Layer w20: U3.1 5682.95,1202.95 5757,1277 5757,2435 5727.88,2464.12 5665.12,2464.12 5655,2454 U4.19
Q2: U3.2 U4.18 | length 2005.6
  Top Layer w20: U3.2 5522.62,1101 5721,1101 5783,1163 5783,2462 5750,2495 5656.77,2495 5605,2443.23 U4.18
Q3: U3.3 U4.17 | length 2260.4
  Top Layer w20: U3.3 5448.62,1075 5740,1075 5809,1144 5809,2472.77 5760.77,2521 5646,2521 5555,2430 U4.17
Q4: U3.4 U4.16 | length 1596.9
  Top Layer w20: U3.4 5220.67,1545.67 5346,1671 5503.08,1671 5699,1866.92 5699,2206 5598.19,2306.81 5513.87,2306.81 5505,2315.68 U4.16
Q5: U3.5 U4.15 | length 1723.7
  Top Layer w20: U3.5 5120.67,1600.67 5217,1697 5492.31,1697 5673,1877.69 5673,2195.23 5587.42,2280.81 5474.19,2280.81 5455,2300 U4.15
Q6: U3.6 U4.14 | length 1867.8
  Top Layer w20: U3.6 5020.67,1665.67 5078,1723 5481.54,1723 5647,1888.46 5647,2184.46 5576.65,2254.81 5415,2254.81 5405,2264.81 U4.14
Q7: U3.7 U4.13 | length 1932
  Top Layer w20: U3.7 4920.67,1624.67 5045,1749 5470.77,1749 5621,1899.23 5621,2173.69 5565.88,2228.81 5386.19,2228.81 5355,2260 U4.13
Q8: U3.8 U4.12 | length 2003.3
  Top Layer w20: U3.8 4820.67,1570.67 5025,1775 5460,1775 5595,1910 5595,2162.92 5555.11,2202.81 5332.19,2202.81 5305,2230 U4.12
Q9: U3.9 U5.19 | length 362.8
  Top Layer w20: U3.9 U3.9@4824.21,2147.44 ; v1(5025,2280) U5.19
  Bottom Layer w20: U3.9 4953.23,2280 v1(5025,2280)
Q10: U3.10 U5.18 | length 255.1
  Top Layer w20: U3.10 4975,2201.77 U5.18
Q11: U3.11 U5.17 | length 870.7
  Top Layer w20: U5.17 4925,2340 4725,2140 4725,2032.77 4777.77,1980 4945,1980 5020.67,2055.67 U3.11
Q12: U3.12 U5.16 | length 1035.1
  Top Layer w20: U5.16 4875,2360 4865,2350 4865,2330 4695,2160 4695,2026 4770,1951 5041,1951 5120.67,2030.67 U3.12
Q13: U3.13 U5.15 | length 1216.2
  Top Layer w20: U5.15 4825,2346.77 4666,2187.77 4666,2009 4750,1925 5165,1925 5220.67,1980.67 U3.13
Q14: U3.14 U5.14 | length 1388.9
  Top Layer w20: U5.14 4775,2333.54 4640,2198.54 4640,1998.23 4742.23,1896 5281,1896 5320.67,1935.67 U3.14
Q15: U3.15 U5.13 | length 1535.7
  Top Layer w20: U5.13 4725,2320.31 4614,2209.31 4614,1987.46 4731.46,1870 5360,1870 5420.67,1930.67 U3.15
Q16: U3.16 U5.12 | length 1694.7
  Top Layer w20: U5.12 4675,2307.08 4588,2220.08 4588,1976.69 4724.69,1840 5450,1840 5520.67,1910.67 U3.16
RST: C11.1 MCU1.4 R16.2 S2.1 | length 997.3
  Top Layer w20: S2.1@3810,2340 3810,2385 3909.49,2484.49 MCU1.4
  Top Layer w30: S2.1@4065.91,2340 4140.9,2265 R16.2 C11.1
  Bottom Layer w30: S2.1@3810,2340 S2.1@4065.91,2340
RXD: MCU1.5 U6.2 UART.2 | length 2122.1
  Top Layer w20: U6.2 3825,1365 v1(3840,1350) ; v1(3690,1960) 3940.98,2210.98 MCU1.5
  Bottom Layer w20: v1(3690,1960) 3840,1810 v1(3840,1350) 3890,1350 UART.2
SPEAK: MCU1.22 Q6.1 | length 2128.5
  Top Layer w20: Q6.1 2680,3790 3611.46,3790 3709.46,3692 4138,3692 4206.73,3623.27 MCU1.22
T0: MCU1.10
T1: MCU1.11
TXD: MCU1.7 U6.3 UART.1 | length 2106.2
  Top Layer w20: v1(3840,1275) 3830,1275 3790,1315 U6.3 3635,1315 3595,1355 3595,1795 4003.98,2203.98 MCU1.7
  Bottom Layer w20: v1(3840,1275) 3865,1275 UART.1
VCC: C11.2 C13.2 C16.1 C18.1 C19.1 C20.1 C21.1 LM1.3 MCU1.29 MCU1.38 R8.2 R9.2 R10.2 R11.2 R12.2 R13.2 R14.2 R15.2 R17.2 R18.2 R19.2 R20.2 R22.1 R24.2 R25.2 R26.2 R27.2 R28.1 R29.2 R30.1 R31.2 R32.2 R33.2 R34.2 R35.2 RP4.3 RP5.3 RP6.3 RP7.3 S1.2 S2.2 SPEAK1.1 SW1.3 U4.20 U5.20 UART.4 | length 22305.9
  Top Layer w20: MCU1.38 3708.02,2985.75 3640,3053.77 3640,3330 C20.1 3535,3435 3870,3435 3940.98,3364.02 3940.98,3230.98 ; MCU1.29 3940.98,3230.98 ; v1(4030,3280) 3990,3280 3940.98,3230.98
  Top Layer w25: S1.2@2214.09,3833.23 S1.2@2470,3833.23 ; R35.2 R34.2 C21.1 2860,3525 v1(2905,3570) 2960,3625 3110,3625 R31.2 R29.2 C20.1@3535,3435 ; LM1.3 3755,4015 3795,4055 R32.2 3865,4185 4015,4185 R33.2 ; v1(4925,2540) 4955,2540 5075,2420 U5.20 U5.20@5075,2355
  Top Layer w30: RP7.3 RP6.3 2380,4475 SPEAK1.1 ; R28.1 2895,4030 3060,4030 3095,4065 R30.1 ; R26.2 3040,4710 v1(3040,4660) R27.2 R25.2 3160,4700 R24.2 3335,4725 4180,4725 4380,4925 5680,4925 5775,4830 5775,4645 RP5.3 RP4.3 ; R22.1 3090,1380 3015,1305 SW1.3 3115,1110 v1(3380,1110) ; C19.1 4065.91,2000.9 4065.91,2166.77 4202.68,2030 C11.2 4235,2000 R10.2 ; R33.2 4085,4170 4193.74,4278.74 4299.35,4278.74 4459.61,4439 5304,4439 RP4.3 ; UART.4 4355,1370 C18.1 4340,1505 R8.2 R9.2 R10.2 ; v1(4460,3025) 4465,3030 C13.2 C16.1 4600,2815 4600,2750 4570,2720 4465,2720 v1(4455,2730) 4430,2730 R15.2 R14.2 R13.2 R12.2 R11.2 R10.2 ; R19.2 R18.2 4795,4705 4895,4705 R20.2 ; R17.2 R20.2 ; v1@5690,2290 5705,2305 U4.20 ; R20.2 5095,4695 5330,4695 RP4.3
  Bottom Layer w20: v1(4030,3280) 4290,3280 4460,3110 v1(4460,3025)
  Bottom Layer w25: S1.2@2470,3833.23 2641.77,3833.23 v1(2905,3570) ; v1(4455,2730) 4728.48,2730 4918.48,2540 v1(4925,2540)
  Bottom Layer w30: S1.2@2214.09,3833.23 2214.09,4154.1 SPEAK1.1 2665,4035 v1(2895,4035) ; RP6.3 2565,4660 v1(3040,4660) ; v1(3380,1110) 3455.53,1034.47 4304.47,1034.47 UART.4 ; S2.2@3810,2166.77 S2.2@4065.91,2166.77
  Bottom Layer w50: C18.1 5650,1430 5740,1520 5740,2230 v1(5685,2285)
X1: C13.1 MCU1.15 X1.2 | length 501.2
  Top Layer w20: MCU1.15 4311.26,2891.26 4370,2950 X1.2 4415,3115 C13.1
X2: C16.2 MCU1.14 X1.1 | length 377.7
  Top Layer w20: MCU1.14 4359.76,2859.76 X1.1 4455,2785 C16.2
pads on no net: DWL1.0 DWR1.0 MCU1.26 MCU1.27 MOTORL8.0 MOTORL9.0 MOTORL10.0 MOTORL11.0 MOTORL12.0 MOTORL13.0 MOTORL14.0 MOTORL15.0 MOTORL.0 MOTORR.0 SW1.0 U6.9 U6.10 U6.11 U6.12 U6.13 U6.14 U6.15 UBL.0 USB.8 UWF1.0
copper on no net:
  other v3: 2900,1065 2910,1065 2930,1065 2940,1065 2900,1385 2910,1385 2930,1385 2940,1385
  other v4: 2405.71,1188.35 2246.65,1190.31

## Polygon pours and split planes (outlines as drawn)
GND on Top Layer "Top Layer-No Net" (hatched 90Degree grid 20 track 20, remove dead copper, pour order 2): 2100,5000 2100,975 5850,975 5845,980 5845,4990
GND on Bottom Layer "Top Layer-No Net" (hatched 90Degree grid 20 track 20, remove dead copper, pour order 4): 2100,5000 2100,975 5850,975 5850,4990

## Keep-outs
Keep-Out Layer:
  lines w10: 5830,4975 5830,1000 2115,1000 2115,1015 2115,4900 2115,4980 3580,4980 5835,4980

## Silkscreen, mask and mechanical layers (free items; w line width, h text height)
Top Overlay:
  circle w10: c2760,2160 r190.92
  circle w10: c5190,3755 r192.09
  lines w10: 2760,1700 ccw(c3055,2160) 2760,2620 ; 3575,4675 3575,4980 ; 3585,4980 3975,4980 4365,4980 4365,4625 ; 5181.05,4200.74 ccw(c4895,3745) 5190,3295
  text "2017/3/9" at 2260,2720 h80
  text "-" at 3120,1135 h80
  text "+" at 3225,1135 h80
  text "TXD" at 4010,1015 h30
  text "RXD" at 4115,1015 h30
  text "GND" at 4215,1015 h30
  text "VCC" at 4315,1015 h30

## Text inside footprints (layer, text, board x,y; h text height)
C18: Top Overlay "+" at 4440,1445 h59.06
SPEAK1: Top Overlay "BUZZ" at 2225.55,4247.64 h50 r270